# EAGLE board reg1 (EAGLE 7.2.0)
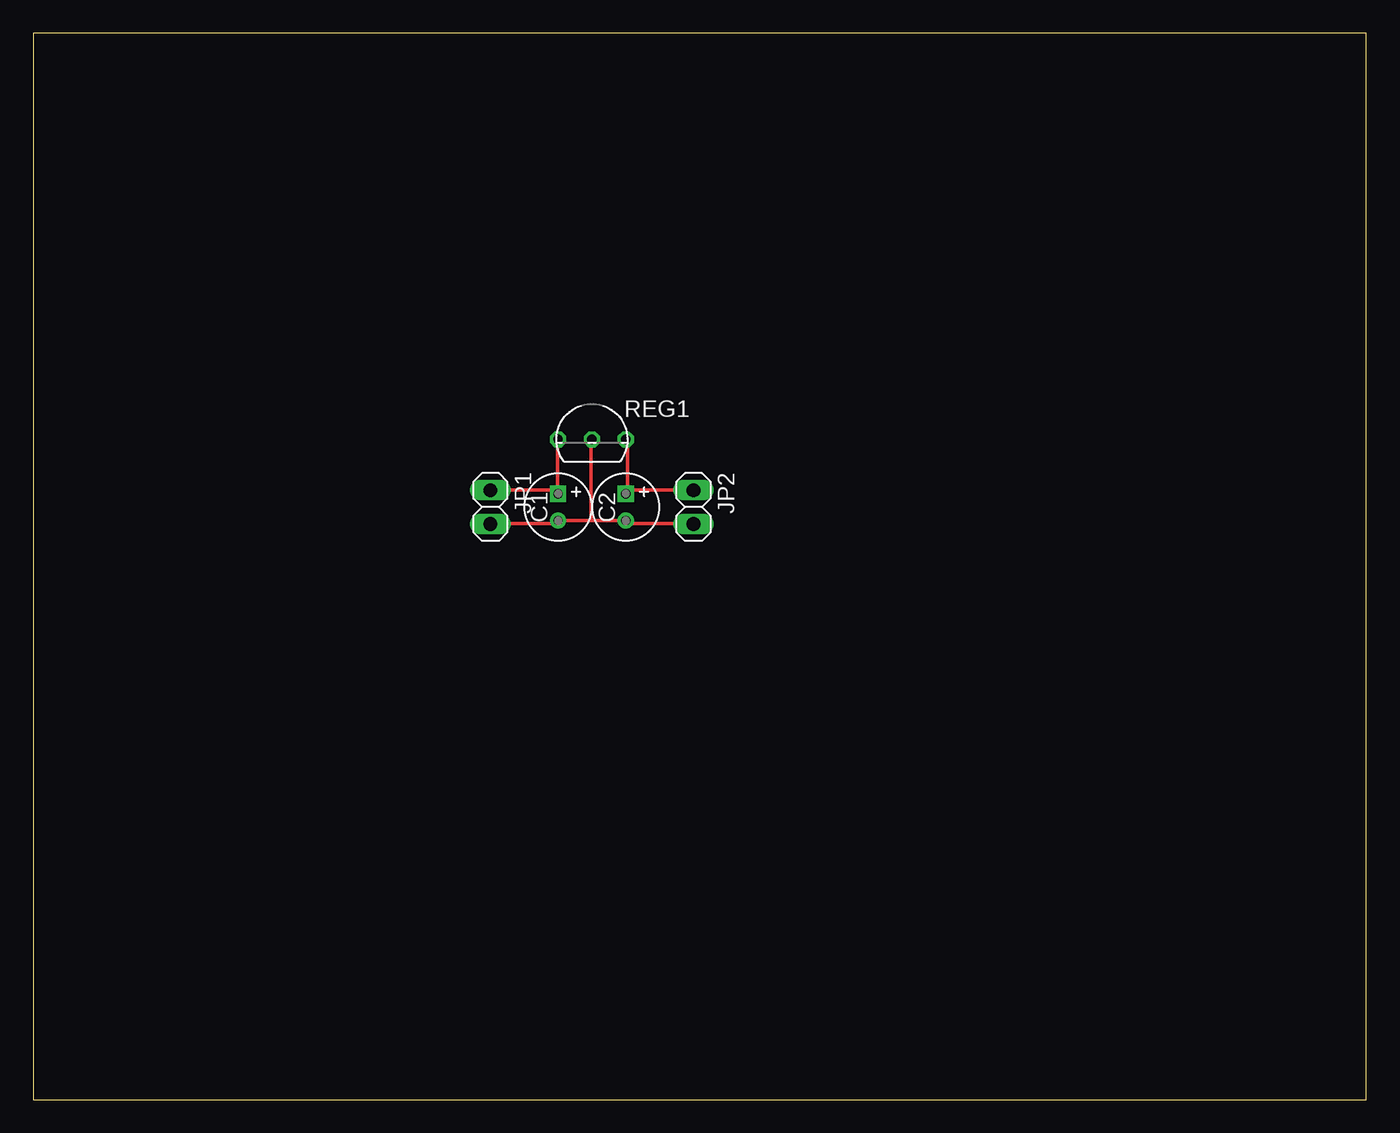
[diagram p0: board, top side]

Size 100 x 80 mm. Coordinates in mm from the lower left corner, seen from the top.
Outline: 0,0 100,0 100,80 0,80 0,0
Copper layers (1*16): Top 0.035mm / dielectric 1.5mm / Bottom 0.035mm
Design rules "default": minimum track width 10mil, minimum drill 24mil, track to track 8mil, track to pad 8mil, pad to pad 8mil, via to via 8mil, smd to smd 8mil, copper to edge 40mil, drill to drill 8mil, minimum pad ring 10mil, minimum via ring 8mil, stop-mask expansion 4mil, vias tented up to drill 0mil, thermal gap 10mil

## Footprints (pad centres in the part's own frame; a part is rotated, then mirrored left to right if it is on the bottom)
050_020 = drill 0.7 square: + -1,0 | drill 0.7: - 1,0
1X02 = drill 1.016 long: 1 -1.27,0; 2 1.27,0
TO92- = drill 0.7 octagon: 1 -2.54,0; 2 0,0; 3 2.54,0

## Placement (x,y rotation side)
C1  100uF  [050_020]  39.37,44.45 270 top
C2  100uF  [050_020]  44.45,44.45 270 top
JP1  [1X02]  34.29,44.45 270 top
JP2  [1X02]  49.53,44.45 270 top
REG1  7805  [TO92-]  41.91,49.53 0 top

## Library data of the parts
C1 C2 = gm-caps-electro-pol
JP1 JP2 = pinhead
REG1 = gm-regulators

## Nets
+5V: C2.+ JP2.1 REG1.3
+9V: C1.+ JP1.1 REG1.1
GND: C1.- C2.- JP1.2 JP2.2 REG1.2

## Tracks (layer width: path | path; a pad name or v marks a point on that pad's centre or on a via)
+5V
  Top 0.254: 44.58,45.72 44.58,49.38 REG1.3 | 44.58,45.72 44.58,45.49 C2.+ 44.58,45.72 | 44.58,45.72 JP2.1
+9V
  Top 0.254: 39.32,45.72 39.32,49.38 REG1.1 | 39.32,45.72 39.32,45.49 C1.+ 39.32,45.72 | 39.32,45.72 JP1.1
GND
  Top 0.254: 41.83,43.43 44.35,43.43 C2.- 44.58,43.43 44.81,43.2 49.38,43.2 JP2.2 | 41.83,43.43 39.55,43.43 C1.- 39.32,43.43 39.09,43.2 34.29,43.2 JP1.2 | 41.83,43.43 41.83,49.38 REG1.2